# Altium PCB TK514_Interrupter_old.PcbDoc
Units mm, origin at the board's own origin, x right, y up, seen from the top; angles counter-clockwise.
Board outline 80 x 60 mm, 2 copper layers (Top Layer, Bottom Layer); 36 components, 31 nets, 204 pads, 24 vias.
Unrouted connection lines stored in the file: 36.
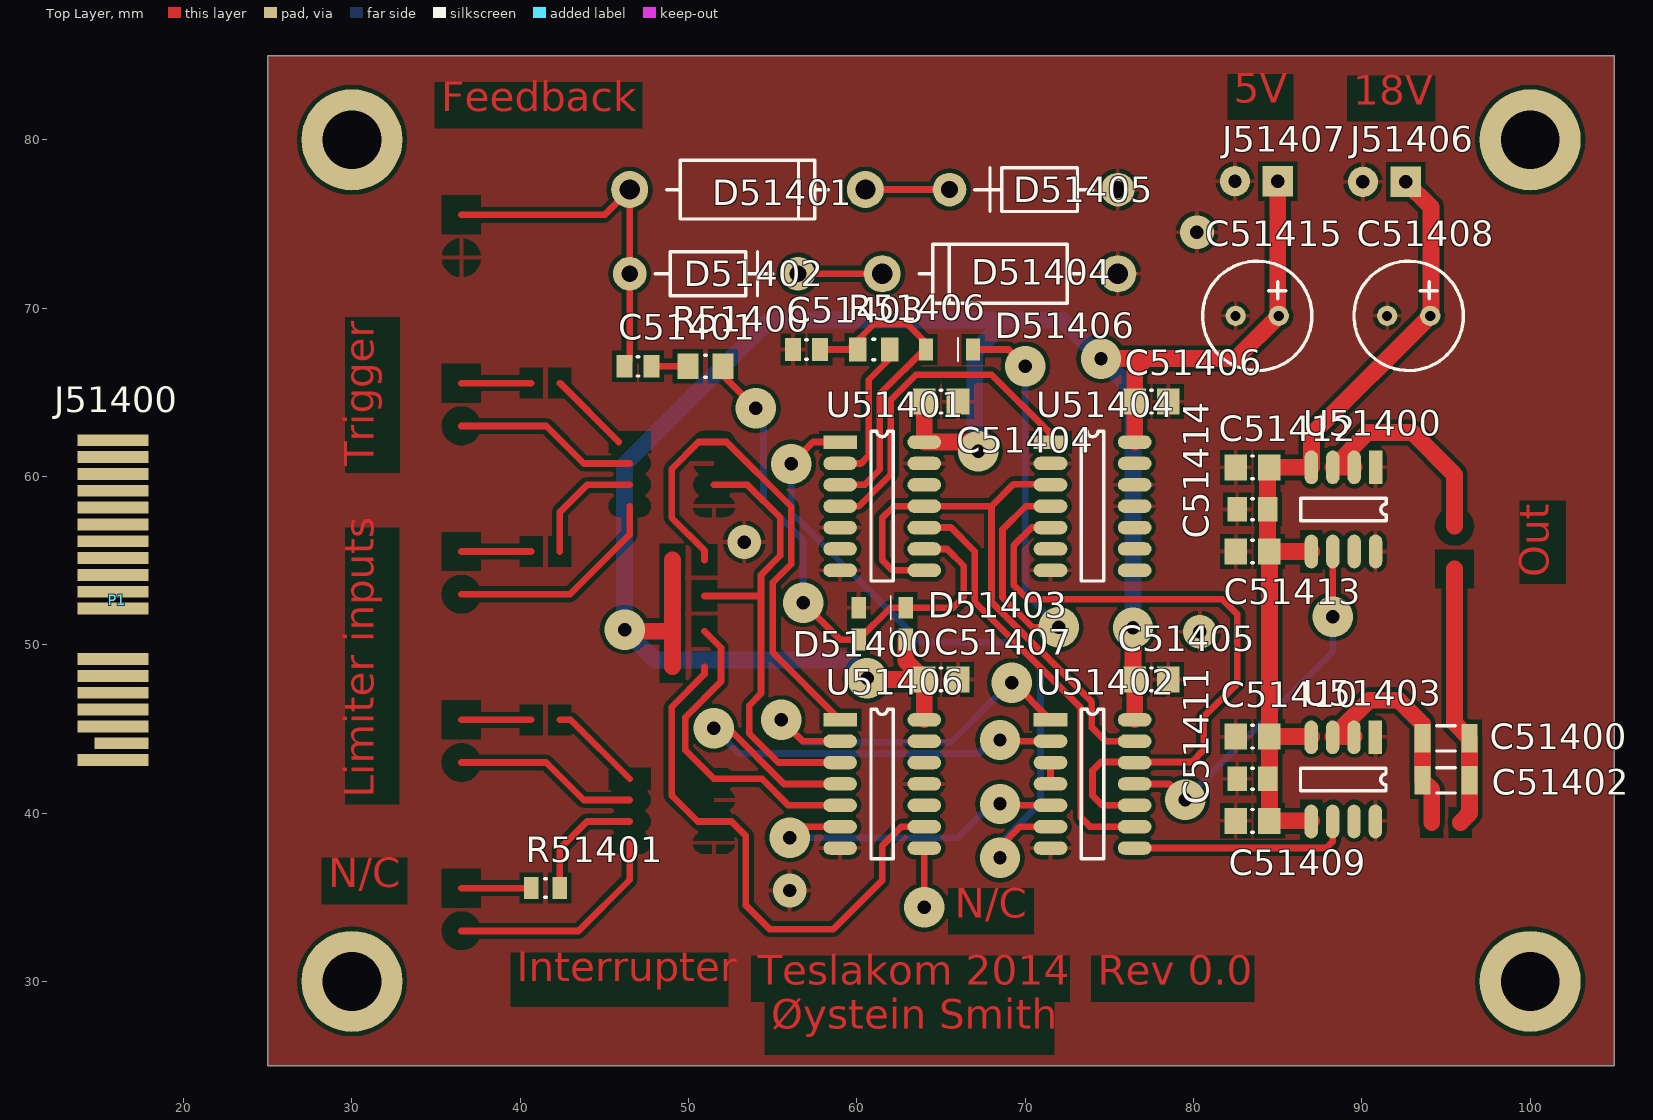
[diagram p0: Top Layer view]
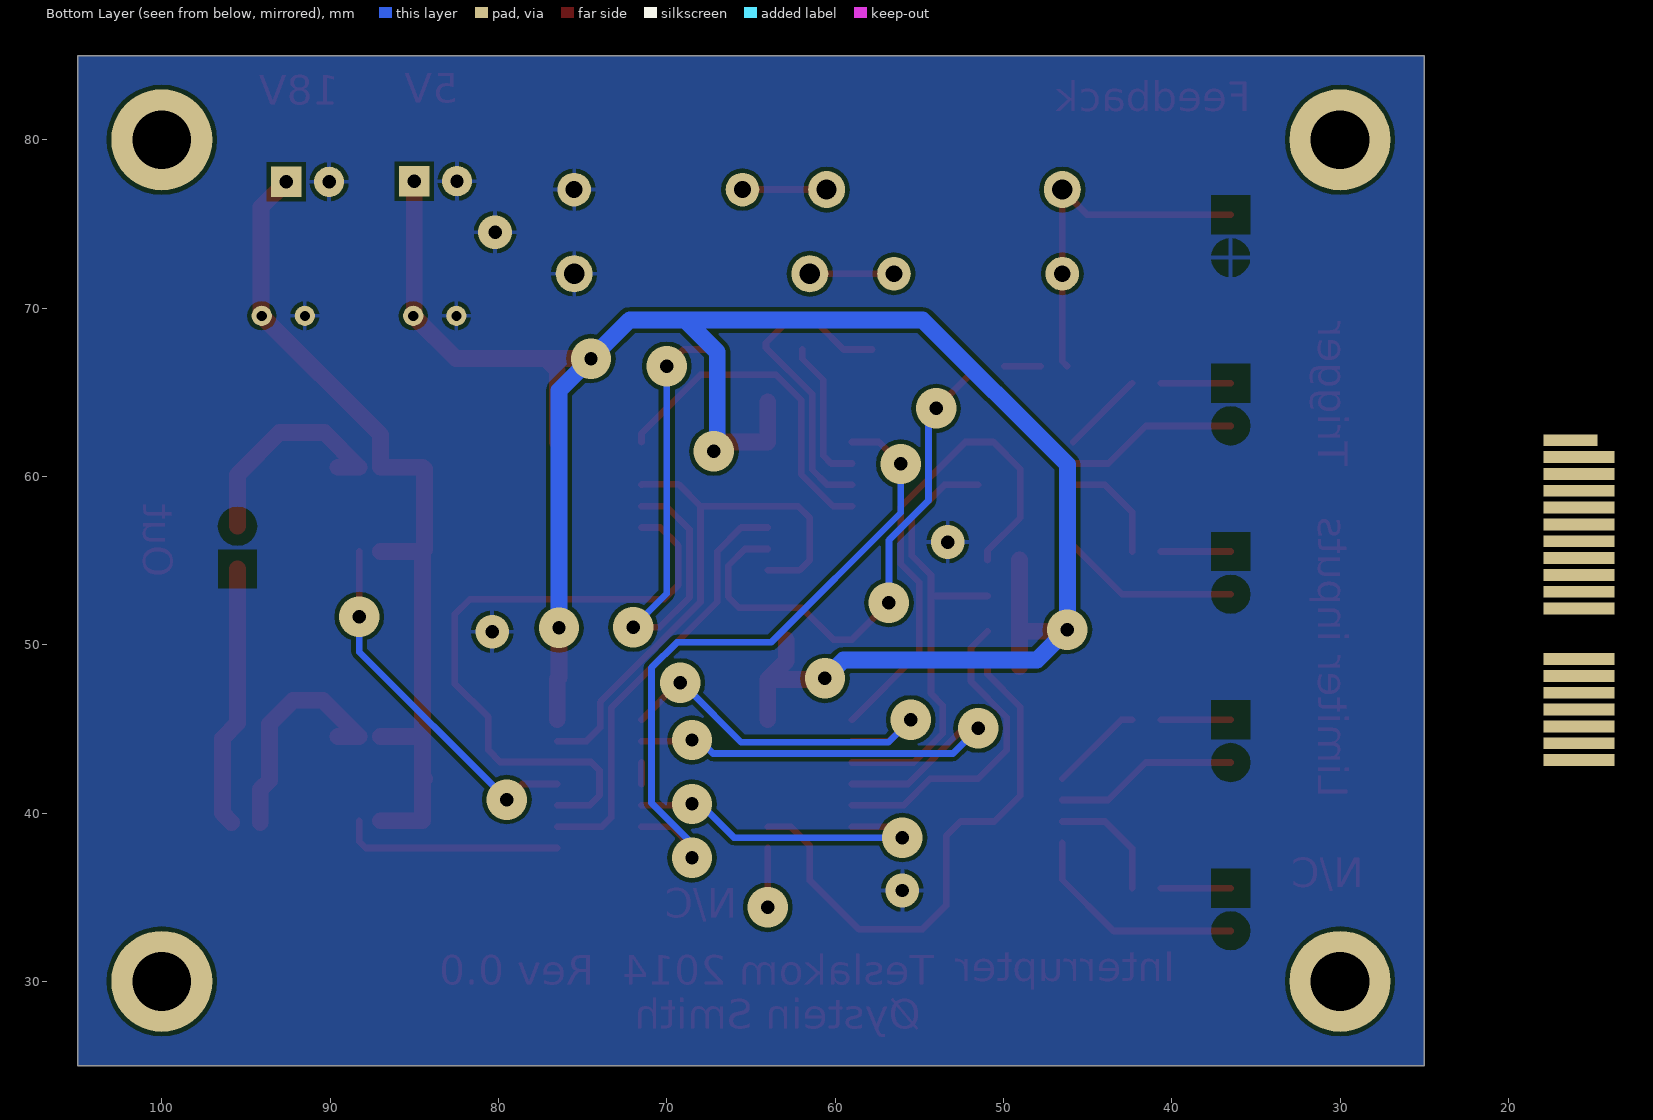
[diagram p1: Bottom Layer view, seen from below]

## Layer stack, top to bottom
Top Solder: solder mask 0.0102, Solder Resist, Dk 3.5
Top Layer: signal copper 0.0356
Dielectric1: dielectric 0.32, FR-4, Dk 4.8
Bottom Layer: signal copper 0.0356
Bottom Solder: solder mask 0.0102, Solder Resist, Dk 3.5

## Board outline
25,25 105,25 105,85 25,85

## Design rules (kind name [scope] priority, off if disabled: settings)
Clearance [All] p1: gap=0.254
PolygonConnect [All] p1: connectstyle=Relief reliefconductorwidth=0.254 reliefentries=4 polygonreliefangle="90 Angle" airgapwidth=0.254
RoutingVias [All] p1: holewidth=0.8 width=2.4 viastyle="Through Hole" minholewidth=0.8 minwidth=2.4 maxholewidth=0.8 maxwidth=3
SolderMaskExpansion [All] p1: expansion=0.102
Width [All] p1: maxlimit=5 minlimit=0.4 preferedwidth=0.4
30 further rules are at their usual default settings.

## Components (designator, comment, footprint, x,y, rotation, side; value= is the part's Value field where it differs from the comment)
C51400 "CAP 10uF 25V 1206(3216)" CAPC1206(3216)190_L 95,44.44 r0 top
C51401 "CAP 100nF 25V 0805(2012)" CAPC0805(2012)145_L 47,66.54 r0 top
C51402 "CAP 10uF 25V 1206(3216)" CAPC1206(3216)190_L 95,41.94 r0 top
C51403 "CAP 22nF 25V 0805(2012)" CAPC0805(2012)145_L 57,67.54 r0 top
C51404 "CAP 100nF 25V 0805(2012)" CAPC0805(2012)145_M 65,64.44 r180 top
C51405 "CAP 100nF 25V 0805(2012)" CAPC0805(2012)145_M 77.5,47.94 r180 top
C51406 "CAP 100nF 25V 0805(2012)" CAPC0805(2012)145_M 77.5,64.44 r180 top
C51407 "CAP 100nF 25V 0805(2012)" CAPC0805(2012)145_M 65,47.94 r180 top
C51408 "CAP" "CAP 2.5mm" 91.5,69.54 r0 top
C51409 "CAP 100nF 25V 0805(2012)" CAPC0805(2012)145_M 83.5,39.54 r0 top
C51410 "CAP 100nF 25V 0805(2012)" CAPC0805(2012)145_M 83.5,44.54 r0 top
C51411 "CAP 1uF 25V 0805(2012)" CAPC0805(2012)145_N 83.5,42.04 r0 top
C51412 "CAP 100nF 25V 0805(2012)" CAPC0805(2012)145_M 83.5,60.54 r0 top
C51413 "CAP 100nF 25V 0805(2012)" CAPC0805(2012)145_M 83.5,55.54 r0 top
C51414 "CAP 1uF 25V 0805(2012)" CAPC0805(2012)145_N 83.5,58.04 r0 top
C51415 "CAP" "CAP 2.5mm" 82.5,69.54 r0 top
D51400 "1N4148" 1N4148 61.5,50.3 r0 top
D51401 "1N5337" 1N5337 46.5,77.04 r0 top
D51402 "1N5819" 1N5819 46.5,72.04 r0 top
D51403 "1N4148" 1N4148 61.5,52.2 r0 top
D51404 "1N5337" 1N5337 75.5,72.04 r180 top
D51405 "1N5819" 1N5819 75.5,77.04 r180 top
D51406 "1N4148" 1N4148 65.5,67.54 r0 top
J51400 "PCI_Express-36P" PCIeX1-GF-2D-1000-1K-O36 15.8,52.65 r270 top
J51406 "2PConnector" "JST 2pin" 92.6,77.5 r90 top
J51407 "2PConnector" "JST 2pin" 85,77.54 r90 top
P1 "PCIeX1-GF-2D-1000-1K-O36" PCIeX1-GF-2D-1000-1K-O36 15.8,52.65 r270 top locked
R51400 "1K 1% 0805(2012)" RESC0805(2012)_M 51,66.54 r0 top
R51401 "10R 5% 0805(2012)" RESC0805(2012)_L 41.5,35.54 r180 top
R51406 "20K 1% 0805(2012)" RESC0805(2012)_N 61,67.54 r180 top
U51400 "MIC4422YM" SOP8 90.81,60.54 r270 top
U51401 "74HC14" SOP14 59,62.04 r0 top
U51402 "74HC08" SOP14 71.5,45.54 r0 top
U51403 "MIC4422YM" SOP8 90.8,44.5 r270 top
U51404 "74HC74" SOP14 71.5,62.04 r0 top
U51406 "74HC14" SOP14 59,45.54 r0 top

## Footprints (in the part's own frame and the unit in brackets; to place one, negate y for a bottom-side part, rotate by r counter-clockwise, add the part's x,y. Pads: shape width x height; smd on the part's side, far side on the other; paste and mask are expansions set on the pad)
1N4148 [mm]
  rect 0.85x1.3 smd: A(-1.4,0) K(1.4,0)
  silkscreen extent 0.5,-0.7 0.5,0.7
1N5337 [mm]
  round 2.2 hole 1.2: A(0,0) K(14,0)
  silkscreen extent 2.2,-1.75 11.8,1.75
1N5819 [mm]
  round 2 hole 1: A(0,0) K(10,0)
  silkscreen extent 1.5,-1.3 8.5,1.3
"CAP 2.5mm" [mm]
  round 1.2 hole 0.6: 1(0,0) 2(2.56,0)
  silkscreen extent -1.97,-3.25 4.53,3.25
CAPC0805(2012)145_L [mm] "Chip Capacitor, Body 2.0x1.2mm, Height 1.45mm, IPC High Density"
  rect 0.95x1.35 smd: 1(-0.8,0) 2(0.8,0)
  silkscreen extent -0.05,-0.58 0.05,0.58, body extent -1.1,-0.72 1.1,0.72, height 1.45
CAPC0805(2012)145_M [mm] "Chip Capacitor, Body 2.0x1.2mm, Height 1.45mm, IPC Low Density"
  rect 1.35x1.55 smd: 1(-1,0) 2(1,0)
  silkscreen extent -0.05,-0.67 0.05,0.67, body extent -1.1,-0.72 1.1,0.72, height 1.45
CAPC0805(2012)145_N [mm] "Chip Capacitor, Body 2.0x1.2mm, Height 1.45mm, IPC Medium Density"
  rect 1.15x1.45 smd: 1(-0.9,0) 2(0.9,0)
  silkscreen extent -0.05,-0.62 0.05,0.63, body extent -1.1,-0.72 1.1,0.73, height 1.45
CAPC1206(3216)190_L [mm] "Chip Capacitor, Body 3.2x1.6mm, Height 1.9mm, IPC High Density"
  rect 0.95x1.7 smd: 1(-1.4,0) 2(1.4,0)
  silkscreen extent -0.55,-0.75 0.55,0.75, body extent -1.7,-0.9 1.7,0.9, height 1.9
"JST 2pin" [mm]
  rect 1.8x1.8 hole 0.8: 1(0,0)
  round 1.8 hole 0.8: 2(0,2.54)
PCIeX1-GF-2D-1000-1K-O36 [mm] "Golden finger, PCIeX1, Dual, Opposite, Pitch 1mm, 36-Position"
  rect 0.7x3.2 smd far side paste-1: A1(-9.5,0.5)
  rect 0.7x4.2 smd far side paste-1: A2(-8.5,0) A3(-7.5,0) A4(-6.5,0) A5(-5.5,0) A6(-4.5,0) A7(-3.5,0) A8(-2.5,0) A9(-1.5,0) A10(-0.5,0) A11(0.5,0) A12(3.5,0) A13(4.5,0) A14(5.5,0) A15(6.5,0) A16(7.5,0) A17(8.5,0) A18(9.5,0)
  rect 0.7x4.2 smd paste-1: B1(-9.5,0) B2(-8.5,0) B3(-7.5,0) B4(-6.5,0) B5(-5.5,0) B6(-4.5,0) B7(-3.5,0) B8(-2.5,0) B9(-1.5,0) B10(-0.5,0) B11(0.5,0) B12(3.5,0) B13(4.5,0) B14(5.5,0) B15(6.5,0) B16(7.5,0) B18(9.5,0)
  rect 0.7x3.2 smd paste-1: B17(8.5,0.5)
RESC0805(2012)_L [mm] "Chip Resistor, Body 2.0x1.3mm, IPC High Density"
  rect 0.85x1.3 smd: 1(-0.85,0) 2(0.85,0)
  silkscreen extent -0.05,-0.55 0.05,0.55, body extent -1.1,-0.67 1.1,0.68, height 0.7
RESC0805(2012)_M [mm] "Chip Resistor, Body 2.0x1.3mm, IPC Low Density"
  rect 1.25x1.5 smd: 1(-1.05,0) 2(1.05,0)
  silkscreen extent -0.05,-0.65 0.05,0.65, body extent -1.1,-0.67 1.1,0.67, height 0.7
RESC0805(2012)_N [mm] "Chip Resistor, Body 2.0x1.3mm, IPC Medium Density"
  rect 1.05x1.4 smd: 1(-0.95,0) 2(0.95,0)
  silkscreen extent -0.05,-0.6 0.05,0.6, body extent -1.1,-0.67 1.1,0.68, height 0.7
SOP8 [mm]
  rect 2x0.8 smd: 1(0,0)
  oval 2x0.8 smd: 2(0,-1.27) 3(0,-2.54) 4(0,-3.81) 5(5,-3.81) 6(5,-2.54) 7(5,-1.27) 8(5,0)
  silkscreen extent 1.84,-4.44 3.17,0.64
SOP14 [mm]
  rect 2x0.8 smd: 1(0,0)
  oval 2x0.8 smd: 2(0,-1.27) 3(0,-2.54) 4(0,-3.81) 5(0,-5.08) 6(0,-6.35) 7(0,-7.62) 8(5,-7.62) 9(5,-6.35) 10(5,-5.08) 11(5,-3.81) 12(5,-2.54) 13(5,-1.27) 14(5,0)
  silkscreen extent 1.84,-8.25 3.17,0.64

## Part data
C51400 C51402: library part CMP-1037-04979-1, "CAP 10uF 25V ±10% 1206 (3216 Metric) Thickness 1.9mm SMD"
C51401: library part CMP-1036-04410-1, "CAP 100nF 25V ±10% 0805 (2012 Metric) Thickness 1.45mm SMD"
C51403: library part CMP-1036-04050-1, "CAP 22nF 25V ±5% 0805 (2012 Metric) Thickness 1.45mm SMD"
C51404 C51405 C51406 C51407 C51409 C51410 C51412 C51413: library part CMP-1036-04408-1, "CAP 100nF 25V ±5% 0805 (2012 Metric) Thickness 1.45mm SMD"
C51411 C51414: library part CMP-1036-04752-1, "CAP 1uF 25V ±5% 0805 (2012 Metric) Thickness 1.45mm SMD"
J51400: library part PCIeX1-GF-2D-1000-1K-O36, "PCI express kortkankonnektor"
J51406 J51407: library part "JST 2pin", "pris pr. stk."
P1: library part CMP-0001-00030-2, "Golden finger, PCIeX1, Dual, Opposite, Pitch 1mm, 36-Position"
R51400: library part CMP-1013-00510-1, "1K 0.125W 1% 0805 (2012 Metric)  SMD"
R51401: library part CMP-1013-00026-1, "10R 0.125W 5% 0805 (2012 Metric)  SMD"
R51406: library part CMP-1013-00655-1, "20K 0.125W 1% 0805 (2012 Metric)  SMD"

## Free pads (board coordinates)
  round 6 hole 3.5: 0(30,30) 1(30,80) 2(100,80) 3(100,30)

## Via types
v1: diameter 2.4, hole 0.8, Top Layer to Bottom Layer, 20 vias
v2: diameter 2, hole 0.8, Top Layer to Bottom Layer, 4 vias

## Nets (pads, with @x,y where several pads share a name; then routed paths per layer and width w, separated by ;. In a path a pad name is that pad's centre, name@x,y a point inside that pad or via, vN(x,y) a via of type N, cw(c..) or ccw(c..) an arc to the next point about the centre after c; other vN are vias at no path point)
0_FE: J51400.A2
0_INT: J51400.A5
0_RES: J51400.A4
0_ST: J51400.A3
+5: C51404.2 C51405.2 C51406.2 C51407.2 C51415.2 D51400.K J51407.1 U51401.14 U51402.14 U51404.14 U51406.14 | length 137.8
  Top Layer w1: v1(46.2,50.9) 46.3,50.8 49.05,50.8 ; 49.05,48.7 49.05,50.8 ; 49.05,55.04 49.05,52.9 49.05,50.8 ; v1(60.6,48) 60.66,47.94 C51407.2 ; D51400.K 62.9,49.04 C51407.2 ; U51406.14 C51407.2 ; C51404.2 U51401.14 66.66,62.04 v1(67.2,61.5) ; v1(74.5,67) 77.2,67 ; v1(76.4,51) 76.4,48.04 C51405.2 U51402.14 ; U51404.14 C51406.2 76.5,66.3 77.2,67 ; J51407.1 85,69.6 C51415.2 82.52,67 77.2,67
  Bottom Layer w1: v1(60.6,48) 59.5,49.1 48,49.1 v1(46.2,50.9) 46.2,60.7 54.8,69.3 68.9,69.3 ; v1(67.2,61.5) 67,61.7 67,67.4 68.9,69.3 ; v1(76.4,51) 76.4,65.1 v1(74.5,67) 72.2,69.3 68.9,69.3
+18: C51408.2 C51409.2 C51410.2 C51411.2 C51412.2 C51413.2 C51414.2 J51406.1 U51400.1 U51400.8 U51403.1 U51403.8 | length 51.7
  Top Layer w1: 87,39.54 C51409.2 84.5,41.94 C51411.2 84.5,42.14 C51410.2 ; 87,44.54 C51410.2 ; 87,55.54 C51413.2 ; J51406.1 94.1,76 94.1,69.58 C51408.2 87,62.48 87,60.54 C51412.2 84.4,60.44 C51414.2 84.4,55.64 C51413.2 ; C51410.2 C51413.2
GND: C51403.1 C51404.1 C51405.1 C51406.1 C51407.1 C51408.1 C51409.1 C51410.1 C51411.1 C51412.1 C51413.1 C51414.1 C51415.1 D51403.A D51404.A D51405.A J51400.A11 J51400.A15 J51400.B15 J51406.2 J51407.2 U51400.4 U51400.5 U51401.7 U51401.13 U51402.7 U51403.4 U51403.5 U51404.2 U51404.7 U51404.11 U51404.12 U51406.5 U51406.7 U51406.11 U51406.13 | length 18.9
  Top Layer w0.4: 50.95,50.8 51.929,49.821 51.929,47.812 49.8,45.683 49.8,43.74 51.5,42.04 54.36,42.04 55.94,40.46 U51406.5
  other v2: 56,35.4 80.373,50.773 53.3,56.1 80.2,74.5
KORT_INNSATT: J51400.A17 J51400.B1 J51400.B17
LIMIT: J51400.B3 U51401.3
NetC51400_1: C51400.1 C51402.1 R51401.1 U51400.6 U51400.7 | length 21.3
  Top Layer w0.4: R51401.1 42.35,37.89 43.96,39.5 46.5,39.5
  Top Layer w1: 89.54,44.54 88.27,44.54 90.43,46.7 92.2,46.7 93.6,45.3 C51400.1 C51402.1 94.15,41.39 94.15,39.44
NetC51400_2: C51400.2 C51402.2 J51400.A13 R51401.2 | length 4.1
  Top Layer w0.4: 36.5,35.54 R51401.2
NetC51401_1: C51401.1 D51401.A D51402.A J51400.A12 | length 21.2
  Top Layer w0.4: 36.5,75.54 45,75.54 D51401.A D51402.A 46.5,66.84 C51401.1
NetC51401_2: C51401.2 R51400.1 | length 2.1
  Top Layer w0.4: C51401.2 R51400.1
NetC51403_2: C51403.2 D51406.A R51406.2 U51406.3 | length 46.6
  Top Layer w0.4: 50.95,52.9 54.3,52.9 ; 51.5,59.5 53.5,59.5 55.446,57.554 55.446,55.3 54.3,54.154 54.3,52.9 ; C51403.2 59.5,67.54 61,69.04 63,69.04 64.1,67.94 64.1,67.64 61.354,64.894 61.354,60.394 60.46,59.5 59,59.5 ; U51406.3 55.325,43 53.6,44.725 53.6,46.4 54.3,47.1 54.3,52.9
NetD51400_A: D51400.A D51403.K R51400.2 U51401.9 | length 32.1
  Top Layer w0.4: R51400.2 52.05,65.99 v1(54,64.04) ; v1(56.8,52.5) 59,50.3 D51400.A 62,52.2 D51403.K 65.7,52.2 66.346,52.846 66.346,54.694 65.35,55.69 U51401.9
  Bottom Layer w0.4: v1(54,64.04) 54.446,63.594 54.446,58.569 56.8,56.215 v1(56.8,52.5)
NetD51401_K: D51401.K D51405.K | length 5
  Top Layer w0.4: D51401.K D51405.K
NetD51402_K: D51402.K D51404.K | length 5
  Top Layer w0.4: D51402.K D51404.K
NetD51406_K: D51406.K R51406.1 U51404.4 U51406.2 | length 41.1
  Top Layer w0.4: 59,60.77 60.23,60.77 60.7,61.24 60.7,65.74 61.95,66.99 R51406.1 ; D51406.K 67.9,67.54 69,67.54 v1(70,66.54) ; U51404.4 70.03,58.23 68.654,56.854 68.654,52.811 70.425,51.04 v1(72,51.04)
  Bottom Layer w0.4: v1@69,66.54 v1(70,66.54) 70,53.04 v1(72,51.04)
NetJ51400_A14: J51400.A14 U51403.6 U51403.7
NetU51400_2: U51400.2 U51402.8 | length 13.2
  Top Layer w0.4: U51402.8 87.88,37.92 88.27,38.31 88.27,39.54
NetU51401_2: U51401.2 U51402.1
NetU51401_4: U51401.4 U51402.2
NetU51401_8: U51401.8 U51401.11 U51402.13 U51404.3 | length 34.6
  Top Layer w0.4: U51401.8 62.12,54.42 61.5,55.04 61.5,57.54 62.19,58.23 U51401.11 68,58.23 ; U51404.3 71.46,59.54 69.31,59.54 68,58.23 ; U51402.13 74.77,44.27 73.954,45.086 73.954,46.586 68,52.54 68,58.23
NetU51401_10: U51401.10 U51402.9 | length 25.4
  Top Layer w0.4: U51401.10 65.58,56.96 67,55.54 67,52.54 73.3,46.24 73.3,39.74 73.85,39.19 U51402.9
NetU51402_3: U51402.3 U51406.1 | length 30.3
  Top Layer w0.4: 50.95,55.04 50.95,55.59 49,57.54 49,60.448 50.592,62.04 51.5,62.04 52.26,62.04 56.1,58.2 56.1,54.8 55,53.7 55,49.54 U51406.1
NetU51402_10: U51402.10 U51402.12 U51404.5 | length 39.2
  Top Layer w0.4: U51404.5 70.383,56.96 69.308,55.885 69.308,53.54 70.148,52.7 81.7,52.7 82.6,51.8 82.6,47.7 80.6,45.7 80.6,43.74 79.9,43.04 74.5,43.04 74,42.54 74,41.04 74.58,40.46 U51402.10
NetU51402_11: U51402.11 U51403.2 | length 21.8
  Top Layer w0.4: U51402.11 78.57,41.73 v1(79.5,40.8) ; v1(88.27,51.67) 88.27,55.54
  Bottom Layer w0.4: v1(79.5,40.8) 88.27,49.57 v1(88.27,51.67)
NetU51404_1: U51404.1 U51406.4
TRIGGER: J51400.B2 U51401.1
VCC_EXTRA: J51400.A16 J51400.B16
VCC_P18V: J51400.A18 J51400.B18
pads on no net: J51400.A1 J51400.A6 J51400.A7 J51400.A8 J51400.A9 J51400.A10 J51400.B4 J51400.B5 J51400.B6 J51400.B7 J51400.B8 J51400.B9 J51400.B10 J51400.B11 J51400.B12 J51400.B13 J51400.B14 P1.A1 P1.A2 P1.A3 P1.A4 P1.A5 P1.A6 P1.A7 P1.A8 P1.A9 P1.A10 P1.A11 P1.A12 P1.A13 P1.A14 P1.A15 P1.A16 P1.A17 P1.A18 P1.B1 P1.B2 P1.B3 P1.B4 P1.B5 P1.B6 P1.B7 P1.B8 P1.B9 P1.B10 P1.B11 P1.B12 P1.B13 P1.B14 P1.B15 P1.B16 P1.B17 P1.B18 U51400.3 U51401.5 U51401.6 U51401.12 U51402.4 U51402.5 U51402.6 U51403.3 U51404.6 U51404.8 U51404.9 U51404.10 U51404.13 U51406.6 U51406.8 U51406.9 U51406.10 U51406.12
copper on no net: | length 283.3
  Top Layer w0.4: 36.5,33 43.46,33 46.5,36.04 46.5,38.23 ; 36.5,43 41.54,43 43.77,40.77 46.5,40.77 ; 36.5,45.54 40.65,45.54 ; 36.5,53 42.96,53 46.5,56.54 46.5,58.23 ; 36.5,55.54 40.65,55.54 ; 36.5,63 41.54,63 43.77,60.77 46.5,60.77 ; 36.5,65.54 40.65,65.54 ; 42.35,45.54 43,45.54 46.5,42.04 ; 42.35,55.54 42.35,57.89 43.96,59.5 46.5,59.5 ; 42.35,65.54 45.85,62.04 ; 50.95,48.7 50.95,48.25 49,46.3 49,41.04 50.54,39.5 51.5,39.5 52.54,39.5 53.4,38.64 53.4,34.5 54.8,33.1 58.6,33.1 61.5,36 61.5,38.04 62.65,39.19 64,39.19 ; v1(51.5,45.04) 52.36,45.04 55.67,41.73 59,41.73 ; v1@55.5,45.04 56,45.04 56.77,44.27 59,44.27 ; v1(56,38.54) 56.65,39.19 59,39.19 ; v1(56.1,60.74) 57.4,62.04 59,62.04 ; 59,58.23 60.115,58.23 62.008,60.123 62.008,64.548 63.5,66.04 68,66.04 71.5,62.54 71.5,62.04 ; v1(64,34.4) 64,37.92 ; v1(68.5,37.34) 68.5,37.995 69.695,39.19 71.5,39.19 ; v1(68.5,40.54) 68,40.54 68,40.04 68.42,40.46 71.5,40.46 ; v1(68.5,44.34) 68.05,44.34 68,44.29 68,44.04 68.23,44.27 71.5,44.27 ; v1(69.2,47.74) 69.2,47.84 71.5,45.54 ; 71.5,41.73 71.5,43
  Top Layer w1: 89.54,60.54 88.27,60.54 90.33,62.6 93,62.6 95.5,60.1 95.5,57.04 ; 95.5,54.5 95.5,45.34 96.4,44.44 96.4,41.94 96.4,39.99 95.85,39.44
  Bottom Layer w0.4: v1(51.5,45.04) 53,43.54 67.25,43.54 68.05,44.34 v1(68.5,44.34) ; v1(55.5,45.54) 56.84,44.2 65.571,44.2 68.705,47.335 68.3,47.74 v1(69.2,47.74) ; v1(56,38.54) 66,38.54 68,40.54 v1(68.5,40.54) ; v1(56.1,60.74) 56.1,57.84 63.8,50.14 69.4,50.14 70.9,48.64 70.9,40.6 68.5,38.2 v1(68.5,37.34)

## Polygon pours and split planes (outlines as drawn)
GND on Top Layer "B" (solid, pour order 2): 25,25 25,85 105,85 105,25 25,25
GND on Bottom Layer "B" (solid, pour order 4): 25,25 25,85 105,85 105,25 25,25

## Other copper
Top Layer:
  text "5V" at 82.4,81.6 h3
  text "18V" at 89.5,81.5 h3
  text "Feedback" at 35.3,81.1 h3
  text "Trigger" at 31.9,60.6 h3 r90
  text "Out" at 101.7,54 h3 r90
  text "Limiter inputs" at 31.9,40.9 h3 r90
  text "N/C" at 28.6,35 h3
  text "N/C" at 65.8,33.2 h3
  text "Interrupter" at 39.8,29.4 h3
  text "Teslakom 2014" at 54.1,29.2 h3
  text "Rev 0.0" at 74.3,29.2 h3
  text "Øystein Smith" at 54.9,26.6 h3

## Silkscreen, mask and mechanical layers (free items; w line width, h text height)
Mechanical 1:
  lines w0.1: 16.8,66.45 23.225,66.45 cw(c23.225,64.625) 23.225,62.8 12.8,62.8 12.3,62.3 12.3,52.1 12.8,51.6 19.75,51.6 cw(c19.75,50.65) 19.75,49.7 12.8,49.7 12.3,49.2 12.3,43 12.8,42.5 25.05,42.5
Mechanical 7:
  lines w0.1: 20.25,66.45 23.225,66.45 cw(c23.225,64.625) 23.225,62.8 26.05,62.8